# EAGLE board Door locking pcb (EAGLE 6.6.0)
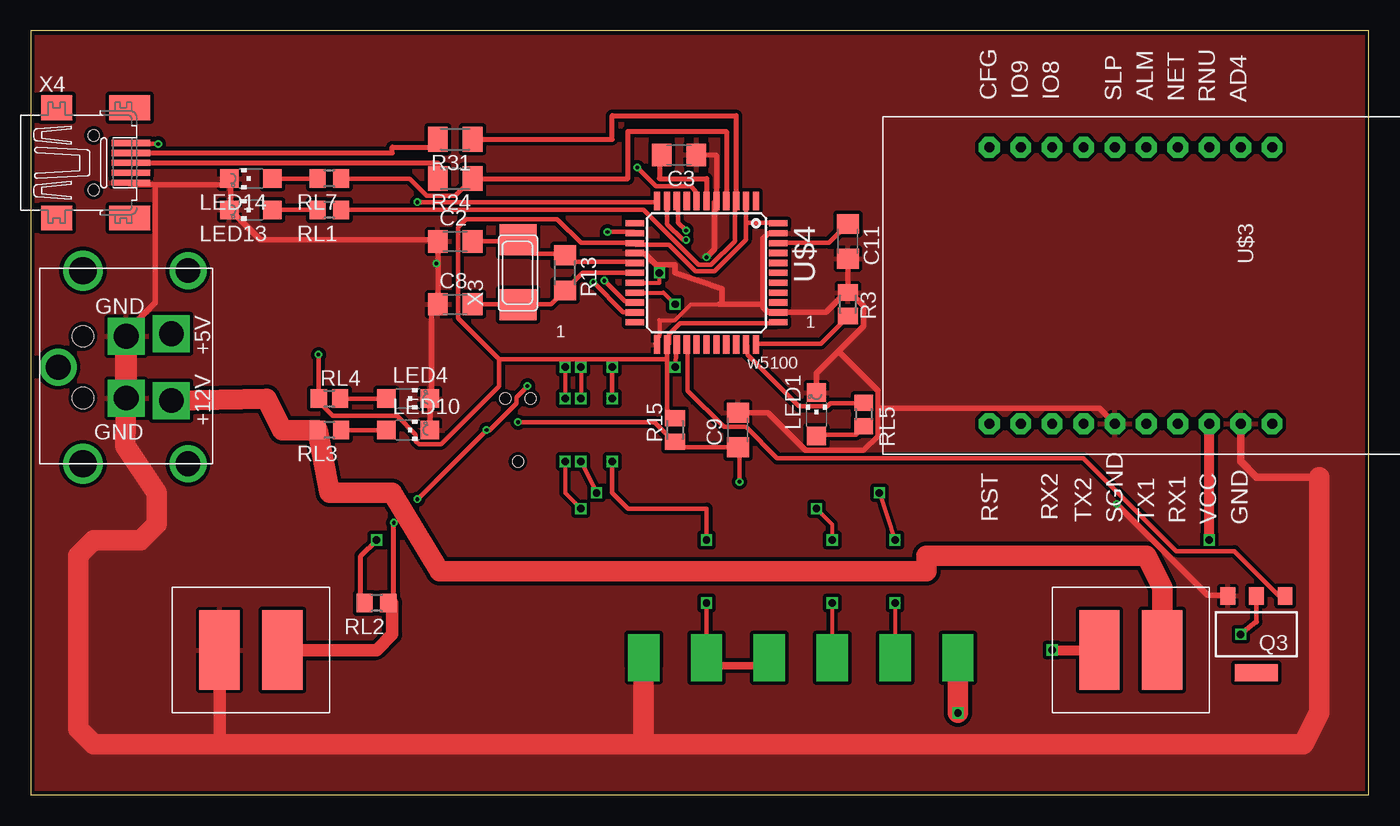
[diagram p0: board, top side]
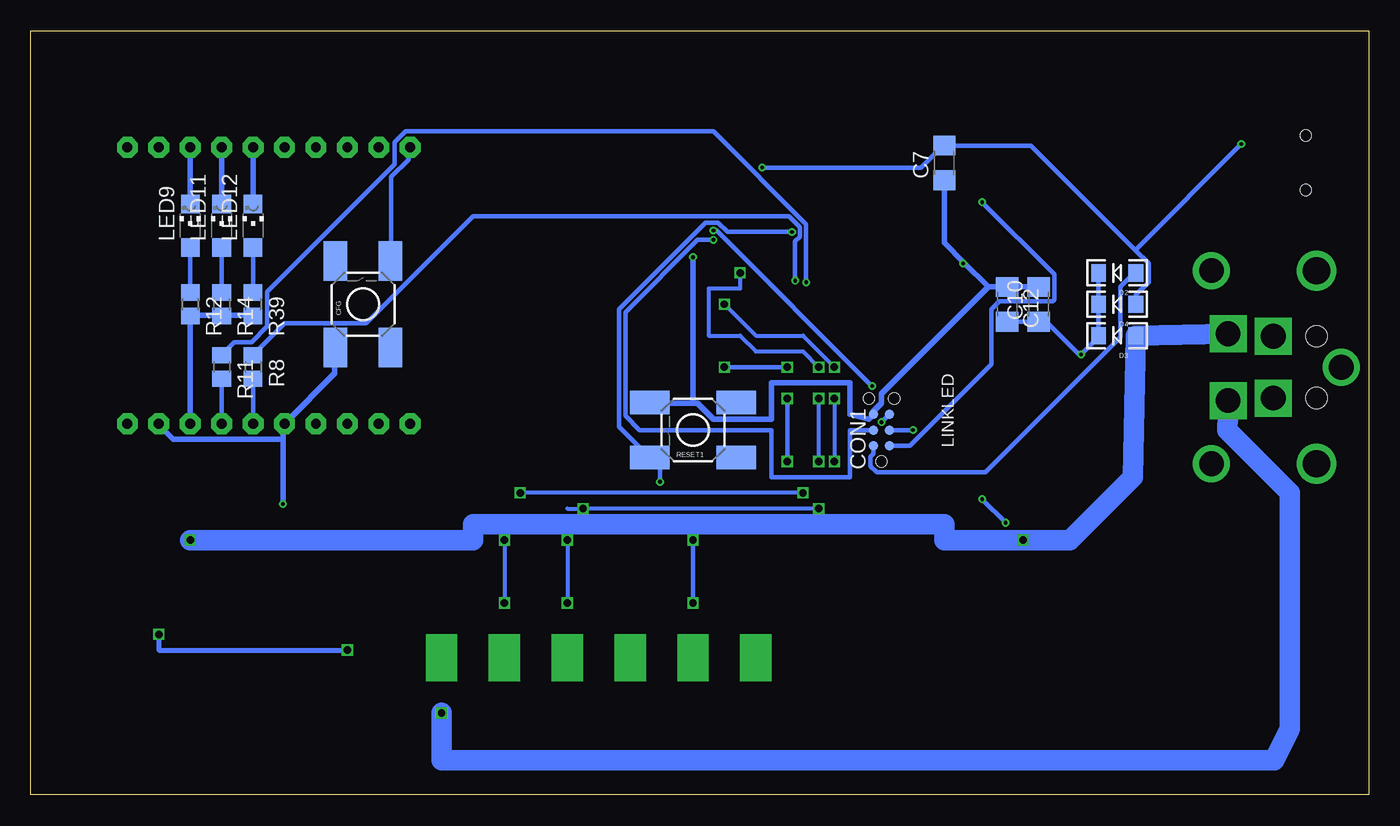
[diagram p1: board, bottom side, seen from below]

Size 108.13 x 61.71 mm. Coordinates in mm from the lower left corner, seen from the top.
Outline: 0,0 108.13,0 108.13,61.71 0,61.71 0,0
Copper layers (1*16): Top 0.035mm / dielectric 1.5mm / Bottom 0.035mm
Design rules "Fusion_eagle_rule_v1.1": minimum track width 6mil, minimum drill 12mil, track to track 6mil, track to pad 6mil, pad to pad 6mil, via to via 6mil, smd to smd 0mil, copper to edge 10mil, drill to drill 10mil, minimum pad ring 10mil, minimum via ring 6mil, stop-mask expansion 2mil, vias tented up to drill 100mil, thermal gap 10mil
Net classes: 0 default: width 0.356 mm; 1 power: width 0.457 mm; 2 VIN: width 0.457 mm; 3 fine: width 0.356 mm; 4 aref: width 0.356 mm
vRestrict: area 47,34.5 to 62.2,38.4; area 47,35.8 to 50.8,49.8; area 58.4,37.1 to 62.2,49.8; area 47,46 to 62.2,49.8; area 47,25.7 to 62.2,29.5

## Footprints (pad centres in the part's own frame; a part is rotated, then mirrored left to right if it is on the bottom)
C1206 = smd 1.6 x 1.8: 1 -1.4,0; 2 1.4,0
TACTILE_SWITCH_SMD = smd 3.175 x 1.905: 1 -3.493,2.223; 2 3.493,2.223; 3 -3.493,-2.223; 4 3.493,-2.223
TC2030-MCP-NL = smd 0.787 x 0.787: 5V 1.27,0.635; GND 3.81,0.635; MISO 1.27,-0.635; MOSI 2.54,0.635; RESET 3.81,-0.635; SCK 2.54,-0.635 | hole 0.889: 0,0; 5.08,-1.016; 5.08,1.016
LED-1206 = smd 1.2 x 1.4: A -1.5,0; C 1.5,0
2-PIN-5.08S = smd 3.251 x 6.452: 1 -2.54,0; 2 2.54,0
CHIPLED_1206 = smd 1.5 x 1.5: A 0,-1.75; C 0,1.75
ELPUTAS = drill 0 pad 2.54 square: P$3 -1.27,0; P$4 0,0
PG-SOT-223 = smd 1.2 x 1.4: 1 -2.311,-3.099; 2 0,-3.099; 3 2.311,-3.099 | smd 3.5 x 1.4: 4 0,3.099
M0805 = smd 1.3 x 1.6: 1 -0.95,0; 2 0.95,0
R0805 = smd 1.3 x 1.5: 1 -0.95,0; 2 0.95,0
R1206 = smd 1.6 x 1.803: 1 -1.422,0; 2 1.422,0
M1206 = smd 1.6 x 2: 1 -1.4,0; 2 1.4,0
R0805' = smd 1.3 x 1.5: 1 -0.85,0; 2 0.85,0
SZ05-ZIGBEE = drill 0.8 pad 1.676 octagon: 6 -11.415,13.971; 7 -11.415,11.431; 11 -11.415,1.271; 12 -11.415,-1.269; 13 -11.415,-3.809; 14 -11.415,-6.349; 17 10.925,-6.349; 18 10.925,-3.809; 19 10.925,-1.269; 25 10.925,13.971; ALM -11.415,3.811; CFG -11.415,-8.889; GND 10.925,11.431; NET -11.415,6.351; RNU -11.415,8.891; RST 10.925,-8.889; RX1 10.925,6.351; SGND 10.925,1.271; TX1 10.925,3.811; VCC 10.925,8.891
TQFP44 = smd 1.5 x 0.5: 1 -5.8,4; 2 -5.8,3.2; 3 -5.8,2.4; 4 -5.8,1.6; 5 -5.8,0.8; 6 -5.8,0; 7 -5.8,-0.8; 8 -5.8,-1.6; 9 -5.8,-2.4; 10 -5.8,-3.2; 11 -5.8,-4; 23 5.8,-4; 24 5.8,-3.2; 25 5.8,-2.4; 26 5.8,-1.6; 27 5.8,-0.8; 28 5.8,0; 29 5.8,0.8; 30 5.8,1.6; 31 5.8,2.4; 32 5.8,3.2; 33 5.8,4 | smd 0.5 x 1.5: 12 -4,-5.8; 13 -3.2,-5.8; 14 -2.4,-5.8; 15 -1.6,-5.8; 16 -0.8,-5.8; 17 0,-5.8; 18 0.8,-5.8; 19 1.6,-5.8; 20 2.4,-5.8; 21 3.2,-5.8; 22 4,-5.8; 34 4,5.8; 35 3.2,5.8; 36 2.4,5.8; 37 1.6,5.8; 38 0.8,5.8; 39 0,5.8; 40 -0.8,5.8; 41 -1.6,5.8; 42 -2.4,5.8; 43 -3.2,5.8; 44 -4,5.8
KPJX-4S-S = drill 2 square: +5V 2.7,1.35; +12V -2.7,1.35; GND1 -2.5,5; GND2 2.5,5 | drill 2: P$1 -7.8,0; P$2 7.8,0; P$11 0,10.5 | drill 2.2: P$3 -7.8,8.5; P$4 7.8,8.5 | hole 1.7: -2.5,8.5; 2.5,8.5
NX6035 = smd 2.5 x 3: P$1 2.665,0; P$2 -2.565,0
32005-201 = smd 3.1 x 0.5: 1 3,1.6; 2 3,0.8; 3 3,0; 4 3,-0.8; 5 3,-1.6 | smd 2.5 x 2: M1 -3,-4.45; M2 -3,4.45 | smd 3.3 x 2: M3 2.9,4.45; M4 2.9,-4.45 | hole 0.9: 0,2.2; 0,-2.2

## Placement (x,y rotation side)
C2  22pF  [C1206]  34.29,44.7 0 top
C3  100nF  [C1206]  52.39,51.69 180 top
C7  10uF  [C1206]  34.29,51.05 90 bottom
C8  22pF  [C1206]  34.29,39.62 0 top
C9  100nF  [C1206]  57.15,29.46 90 top
C10  10uF  [C1206]  26.67,39.62 90 bottom
C11  100nF  [C1206]  66.04,44.7 270 top
C12  100nF  [C1206]  29.21,39.62 270 bottom
CFG  Configure  [TACTILE_SWITCH_SMD]  81.28,39.62 90 bottom
CON1  SPI  [TC2030-MCP-NL]  39.37,26.92 90 bottom
D2  1N581D1206  [LED-1206]  20.32,42.16 180 bottom
D3  1N581D1206  [LED-1206]  20.32,37.08 180 bottom
D4  1N581D1206  [LED-1206]  20.32,39.62 180 bottom
J1  22--02  [2-PIN-5.08S]  88.9,11.68 180 top
J7  22--02  [2-PIN-5.08S]  17.78,11.68 180 top
LED1  GREEN  [CHIPLED_1206]  63.5,30.73 0 top
LED4  RED  [CHIPLED_1206]  30.48,32 270 top
LED9  RED  [CHIPLED_1206]  95.25,45.97 0 bottom
LED10  RED  [CHIPLED_1206]  30.48,29.46 270 top
LED11  RED  [CHIPLED_1206]  92.71,45.97 0 bottom
LED12  RED  [CHIPLED_1206]  90.17,45.97 0 bottom
LED13  RED  [CHIPLED_1206]  17.78,47.24 90 top
LED14  GREEN  [CHIPLED_1206]  17.78,49.78 90 top
PIN1  TERMINALSUPERFICIAL  [ELPUTAS]  69.85,11.68 90 top
PIN2  TERMINALSUPERFICIAL  [ELPUTAS]  64.77,11.68 90 top
PIN3  TERMINALSUPERFICIAL  [ELPUTAS]  59.69,11.68 90 top
PIN4  TERMINALSUPERFICIAL  [ELPUTAS]  54.61,11.68 90 top
PIN5  TERMINALSUPERFICIAL  [ELPUTAS]  49.53,11.68 90 top
PIN6  TERMINALSUPERFICIAL  [ELPUTAS]  74.93,11.68 90 top
Q3  BSP75  [PG-SOT-223]  99.06,12.95 180 top
R3  10k  [M0805]  66.04,39.62 270 top
R8  1K  [R0805]  90.17,34.54 270 bottom
R11  1K  [R0805]  92.71,34.54 270 bottom
R12  1K  [R0805]  95.25,39.62 270 bottom
R13  1M  [R1206]  43.18,42.16 270 top
R14  1K  [R0805]  92.71,39.62 270 bottom
R15  10k  [M0805]  52.07,29.46 90 top
R24  22  [M1206]  34.29,49.78 180 top
R31  22  [M1206]  34.29,52.96 180 top
R39  1K  [R0805]  90.17,39.62 270 bottom
RESET1  Reset uC  [TACTILE_SWITCH_SMD]  54.61,29.46 180 bottom
RL1  1K  [R0805]  24.13,47.24 180 top
RL2  10K  [R0805]  27.94,15.49 180 top
RL3  1K  [R0805]  24.13,29.46 180 top
RL4  1K  [R0805']  24.13,32 0 top
RL5  1K  [R0805]  67.31,30.73 270 top
RL7  1K  [R0805]  24.13,49.78 180 top
U$3  SZ05-ZIGBEE  [SZ05-ZIGBEE]  86.36,40.89 270 top
U$4  ATMEGA32U4-AU  [TQFP44]  54.61,42.16 270 top
U$6  KPJX-4S-S  [KPJX-4S-S]  12.7,34.54 90 top
X3  16MHz  [NX6035]  39.37,42.16 90 top
X4  MINI-USB  [32005-201]  5.08,51.05 0 top

## Library data of the parts
C2 C3 C7-C12 R8 R11-R14 R39 RL1-RL3 RL5 RL7 = rcl
CFG CON1 D2-D4 J1 J7 RESET1 U$3 U$6 X3 = lpatiny
LED1 LED4 LED9-LED14 U$4 = adafruit
PIN1-PIN6 = lomasenlibraries (3)
Q3 = infineon; OC_FARNELL: unknown; OC_NEWARK: unknown
R3 R15 R24 R31 RL4 = resistor
X4 = con-cypressindustries; OC_FARNELL: unknown; OC_NEWARK: unknown

## Nets
+5V [power]: D3.A R12.2 R14.2 R39.2 RL2.2 U$3.VCC U$6.+5V
+5V/1 [fine]: C10.1 C12.2 D2.C D3.C D4.C R15.2 RL4.1 U$4.2 U$4.14 U$4.24 U$4.34 U$4.44
+12V [power]: J1.1 PIN6.P$4 RL3.2 U$6.+12V
A0: U$4.36
A1: U$4.37
A2: U$4.38
A3: U$4.39
A4: U$4.40
A5: U$4.41
AREF: C11.1 U$4.42
CS: PIN3.P$3 PIN4.P$3 U$4.25
D5*: U$4.31
D6*: U$4.27
D7*: U$4.1
D8*: U$4.28
D9*: U$4.29
D10*: U$4.30
D11*: U$4.12
D12*: Q3.1 U$4.26
D13*: RL5.1 U$4.32
D+USB: R24.2 X4.3
D-USB: R31.2 X4.2
GND [power]: C2.1 C3.1 C7.1 C8.1 C9.2 C10.2 C11.2 C12.1 CFG.1 CON1.GND J7.2 LED1.C LED4.C LED10.C LED13.C LED14.C PIN5.P$3 Q3.3 R3.1 RESET1.4 U$3.GND U$3.SGND U$4.5 U$4.15 U$4.23 U$4.35 U$4.43 U$6.GND1 U$6.GND2 X4.5
GND1 [VIN]: LED9.C U$3.RNU
GND2 [VIN]: LED11.C U$3.NET
GND3 [VIN]: LED12.C U$3.ALM
HWB: R3.2 U$4.33
ISP+5V: CON1.5V D2.A
MISO: CON1.MISO U$4.11
MOSI: CON1.MOSI U$4.10
N$2: J1.2 Q3.2
N$3: LED1.A RL5.2
N$8: LED13.A RL1.2
N$11: R11.2 U$3.RX1
N$12: LED4.A RL4.2
N$14: LED14.A RL7.2
N$16: C3.2 U$4.6
N$24: R8.2 U$3.TX1
N$25: LED9.A R12.1
N$26: LED11.A R14.1
N$27: LED12.A R39.1
N$35: CFG.4 U$3.CFG
N$42: C8.2 R13.2 U$4.17 X3.P$2
N$75: LED10.A RL3.1
RD+: R24.1 RL7.1 U$4.4
RD-: R31.1 RL1.1 U$4.3
RESET: C9.1 CON1.RESET R15.1 RESET1.2 U$4.13
RX: R8.1 U$4.20
RXLED: U$4.8
SCK: CON1.SCK J7.1 RL2.1 U$4.9
SCL: PIN1.P$3 U$4.18
SDA: PIN2.P$3 U$4.19
TX: R11.1 U$4.21
TXLED: U$4.22
VUSB: C7.2 D4.A U$4.7 X4.1
XTAL1: C2.2 R13.1 U$4.16 X3.P$1

## Tracks (layer width: path | path; a pad name or v marks a point on that pad's centre or on a via)
+5V  (via drill 0.6)
  Top 0.406: RL2.2 26.67,15.49 26.67,19.3 v27.94,20.57
  Top 0.813: v95.25,20.57 U$3.VCC
  Bottom 0.457: R39.2 90.17,38.73 92.71,38.73 R14.2 92.84,38.73 95.25,38.73 R12.2 U$3.VCC
  Bottom 1.676: U$6.+5V D3.A 19.05,25.65 24.13,20.57 v27.94,20.57 34.29,20.57 34.29,21.84 52.07,21.84 72.39,21.84 72.39,20.57 v95.25,20.57
+5V/1  (via drill 0.3)
  Top 0.356: v23.24,35.56 23.24,32 RL4.1 23.37,31.88 23.37,31.62 24.38,30.61 29.59,30.61 31.11,29.08 31.11,28.57 31.37,28.32 33.15,28.32 37.85,33.02 37.85,35.18 | 57.78,46.23 57.78,47.88 U$4.2 | 57.78,46.23 57.78,44.83 55.24,42.29 53.72,42.29 51.56,44.45 48.9,44.45 U$4.14 48.64,44.58 44.45,44.58 42.55,46.48 35.18,46.48 34.54,45.85 34.54,38.48 37.85,35.18 | 57.78,46.23 60.33,46.23 U$4.44 | 51.44,35.18 51.44,31.12 52.07,30.48 R15.2 | 51.44,35.18 51.44,36.32 U$4.24 51.56,36.45 51.56,37.21 52.45,38.1 60.33,38.1 U$4.34 | 51.44,35.18 37.85,35.18
  Bottom 0.356: C12.2 C10.1 26.54,38.1 25.91,38.1 23.37,35.56 v23.24,35.56 21.84,36.96 D3.C 21.84,37.08 21.84,39.62 D4.C 21.84,39.75 21.84,42.16 D2.C
+12V  (via drill 0.6)
  Top 1.676: U$6.+12V 19.05,32 20.32,29.46 RL3.2 24.13,24.38 29.21,24.38 33.02,18.03 50.8,18.03 72.39,18.03 72.39,19.3 90.17,19.3 91.44,16.76 J1.1 | PIN6.P$4 v74.93,6.6
  Bottom 1.676: v74.93,6.6 74.93,2.79 7.62,2.79 6.35,5.33 6.35,24.38 11.43,29.46 U$6.+12V
AREF
  Top 0.356: U$4.42 60.45,44.58 64.52,44.58 C11.1
CS  (via drill 0.6)
  Top 0.356: U$4.25 v52.07,34.54 | v46.99,34.54 v46.99,32 | v46.99,26.92 46.99,24.38 48.26,23.11 54.61,23.11 v54.61,20.57 | v54.61,15.49 PIN4.P$3
  Top 0.61: PIN3.P$3 PIN4.P$3
  Bottom 0.356: v52.07,34.54 v46.99,34.54 | v46.99,32 v46.99,26.92 | v54.61,20.57 v54.61,15.49
D12*
  Top 0.356: Q3.1 101.35,16.13 100.84,16.13 97.28,19.68 92.58,19.68 85.09,27.18 60.33,27.18 57.78,29.72 56.01,29.72 53.09,32.64 53.09,36.32 U$4.26
D13*
  Top 0.356: RL5.1 67.31,31.62 64.64,31.62 64.39,31.37 62.1,31.37 57.91,35.56 57.91,36.32 U$4.32
D+USB
  Top 0.406: X4.3 32.89,51.05 R24.2
D-USB
  Top 0.406: X4.2 29.21,51.85 29.21,52.32 32.89,52.32 R31.2
GND  (via drill 0.3)
  Top 0.305: 50.55,36.45 50.8,37.08 50.8,38.35 52.07,38.35 53.34,39.62 55.88,39.62
  Top 0.406: C3.1 55.41,51.69 U$4.5
  Top 0.457: 55.88,39.62 55.88,40.89 52.07,42.16 52.07,42.8 50.55,42.8 49.66,43.69 48.9,43.69 U$4.15 | 50.55,36.45 U$4.23 | LED1.C 63.5,34.04 65.28,35.81 | 65.28,35.81 67.31,37.85 67.31,39.5 66.29,40.51 66.04,40.51 R3.1 | R3.1 65.91,40.64 64.26,38.99 60.45,38.99 U$4.35 60.2,38.99 59.56,38.99 59.18,39.37 59.18,39.62 | 59.18,39.62 59.18,44.96 59.56,45.34 60.33,45.34 U$4.43 | 68.45,31.24 68.45,32.64 65.28,35.81 | 68.45,31.24 68.45,28.96 67.31,27.81 62.61,27.81 59.56,30.86 C9.2 | R3.1 C11.2 | 59.18,39.62 55.88,39.62 | 55.88,39.62 55.63,39.62 | v87.76,23.5 95.12,16.13 96.65,16.13 Q3.3 | 68.45,31.24 86.36,31.24 U$3.SGND | v54.61,43.43 55.24,44.07 55.24,47.88 U$4.5 | LED10.C 32.26,29.46 32.26,32 LED4.C 32.38,32.13 32.38,39.12 32.77,39.5 C8.1 32.89,42.93 | 32.89,42.93 C2.1 32.77,44.83 18.54,44.83 16.26,47.12 LED13.C 16.13,47.24 16.13,49.78 LED14.C 16,49.28 10.03,49.28 | 10.03,49.28 8.26,49.28 8.13,49.4 X4.5 | 10.03,49.28 10.03,39.75 8.38,38.1 U$6.GND2 | 12.7,4.06 8.89,4.06 | v32.77,42.93 32.89,42.93
  Top 0.61: U$3.GND 97.79,26.92 99.06,25.65 104.14,25.65
  Top 1.016: J7.2 15.24,4.06
  Top 1.676: 49.53,4.06 15.24,4.06 12.7,4.06 5.08,4.06 3.81,5.33 3.81,19.3 5.08,20.57 8.89,20.57 10.16,21.84 10.16,24.38 7.62,28.19 U$6.GND1 | 49.53,4.06 102.87,4.06 104.14,6.6 104.14,25.65 | PIN5.P$3 49.53,4.06
  Top 1.778: U$6.GND1 U$6.GND2
  Top 2.54: U$6.GND2 7.62,37.04
  Bottom 0.457: 87.76,28.7 87.76,29.84 U$3.SGND 87.5,30.1 83.57,34.04 83.57,36.07 CFG.1 | 87.76,28.7 v87.76,23.5 | 30.73,41.02 39.37,32.38 39.37,31.62 40.01,30.99 CON1.GND 40.39,30.35 41.91,30.73 41.91,33.27 48.26,33.27 48.26,30.35 52.96,30.35 54.23,31.62 54.61,31.62 | 30.73,41.02 C12.1 29.08,41.02 C10.2 | C7.1 34.29,44.58 32.7,42.99 | 30.73,41.02 32.7,42.99 | 54.61,31.62 58.04,31.62 RESET1.4 | 54.61,31.62 v54.61,43.43 | v32.77,42.93 32.7,42.99 | 87.76,28.7 96.65,28.7 97.79,29.84 U$3.GND
  pour Top (isolate 0.305): 0,61.21 107.95,61.21 107.95,0.25 0,0.25
GND1
  Bottom 0.457: LED9.C 95.25,52.2 U$3.RNU
GND2
  Bottom 0.457: LED11.C 92.71,52.2 U$3.NET
GND3
  Bottom 0.457: LED12.C 90.17,52.2 U$3.ALM
HWB
  Top 0.356: U$4.33 58.67,36.45 63.88,36.45 66.04,38.61 R3.2
ISP+5V
  Bottom 0.356: CON1.5V 40.01,27.56 40.26,27.3 40.26,26.54 39.75,26.04 30.99,26.04 20.07,36.96 20.07,41.02 18.92,42.16 D2.A
MISO  (via drill 0.3)
  Top 0.356: v31.24,47.88 50.55,47.88 U$4.11
  Bottom 0.356: CON1.MISO 37.08,28.19 30.48,34.8 30.48,39.24 29.84,39.88 25.53,39.88 25.4,40 25.4,42.04 v31.24,47.88
MOSI  (via drill 0.3)
  Top 0.356: v52.96,44.83 52.7,44.83 51.44,46.1 51.44,47.88 U$4.10
  Bottom 0.356: CON1.MOSI 41.91,29.46 41.91,25.65 48.26,25.65 48.26,29.46 58.93,29.46 60.07,30.61 60.07,38.99 54.23,44.83 v52.96,44.83
N$2  (via drill 0.6)
  Top 0.356: 99.06,13.97 Q3.2 | J1.2 86.36,11.43
  Top 0.406: 99.06,13.97 v97.79,12.95
  Top 0.813: v82.55,11.68 J1.2
  Bottom 0.406: v97.79,12.95 97.79,11.68 v82.55,11.68
N$3
  Top 0.356: LED1.A 63.5,29.08 66.67,29.08 67.31,29.72 RL5.2
N$8
  Top 0.356: RL1.2 LED13.A
N$11
  Bottom 0.356: R11.2 U$3.RX1
N$12
  Top 0.356: LED4.A RL4.2
N$14
  Top 0.356: RL7.2 LED14.A
N$16
  Top 0.406: C3.2 50.8,51.05 50.8,49.78 54.61,49.78 U$4.6
N$24
  Bottom 0.356: R8.2 U$3.TX1
N$25
  Bottom 0.356: LED9.A R12.1
N$26
  Bottom 0.356: LED11.A R14.1
N$27
  Bottom 0.356: LED12.A R39.1
N$35
  Bottom 0.356: CFG.4 78.99,43.18 78.99,49.91 77.6,51.31 77.6,52.2 U$3.CFG
N$42
  Top 0.356: C8.2 39.37,39.62 X3.P$2 39.5,39.62 42.04,39.62 43.05,40.64 R13.2 43.18,40.77 44.58,42.16 U$4.17
N$75
  Top 0.356: LED10.A RL3.1
RD+
  Top 0.356: RL7.1 30.61,49.78 32,48.39 34.29,48.39 35.56,49.66 R24.1
  Top 0.406: R24.1 48.26,49.78 48.26,53.59 56.21,53.59 U$4.4
RD-
  Top 0.356: RL1.1 49.53,47.24 53.98,42.8 54.99,42.8 56.9,44.7 56.9,47.88 U$4.3
  Top 0.406: R31.1 46.99,52.96 46.99,54.86 57.01,54.86 U$4.3
RESET  (via drill 0.3)
  Top 0.356: v39.37,30.1 50.42,30.1 52.07,28.45 R15.1 52.2,28.45 52.58,28.07 C9.1 57.28,27.94 v57.28,25.27 | v46.61,45.47 48.77,45.47 U$4.13
  Bottom 0.356: v39.37,30.1 CON1.RESET | v46.61,45.47 51.82,45.47 52.58,46.23 53.59,46.23 60.58,39.24 60.58,29.72 RESET1.2 57.28,26.42 v57.28,25.27
RX  (via drill 0.3)
  Top 0.356: v46.35,41.53 48.01,39.88 48.77,39.88 U$4.20
  Bottom 0.356: v46.35,41.53 46.35,44.7 45.97,45.08 45.97,45.85 46.86,46.74 72.39,46.74 81.03,38.1 87.63,38.1 90.17,35.56 R8.1
SCK  (via drill 0.3)
  Top 0.356: v31.24,23.88 v36.83,29.46 37.08,29.46 39.24,31.62 39.24,32.13 v40.13,33.02 | v52.96,45.59 52.32,46.23 52.32,47.88 U$4.9
  Top 0.406: 29.21,15.49 29.34,15.49 v29.34,21.97
  Top 1.016: J7.1 27.94,11.68 29.21,12.95 29.21,15.49 RL2.1
  Bottom 0.356: v36.83,29.46 CON1.SCK | v29.34,21.97 v31.24,23.88 | v52.96,45.59 52.7,45.59 v40.13,33.02
SCL  (via drill 0.6)
  Top 0.305: U$4.18 50.8,41.36 v50.8,42.16 | v44.45,34.54 v44.45,32 | v44.45,26.92 v45.72,24.38 | v68.58,24.38 v69.85,20.57 | v69.85,15.49 PIN1.P$3
  Bottom 0.305: v50.8,42.16 50.8,40.89 53.34,40.89 53.34,37.08 50.8,37.08 49.53,35.81 45.72,35.81 v44.45,34.54 | v44.45,32 v44.45,26.92 | v45.72,24.38 v68.58,24.38 | v69.85,20.57 v69.85,15.49
SDA  (via drill 0.6)
  Top 0.305: U$4.19 51.13,40.56 v52.07,39.62 | v43.18,34.54 v43.18,32 | v43.18,26.92 43.18,24.38 v44.45,23.11 | v63.5,23.11 64.77,21.84 v64.77,20.57 | v64.77,15.49 PIN2.P$3
  Bottom 0.305: v52.07,39.62 49.53,37.08 45.72,37.08 v43.18,34.54 | v43.18,32 v43.18,26.92 | v44.45,23.11 v63.5,23.11 64.77,23.11 | v64.77,20.57 v64.77,15.49
TX  (via drill 0.3)
  Top 0.356: v45.47,41.4 47.88,38.99 48.77,38.99 U$4.21
  Bottom 0.356: v45.47,41.4 45.47,46.1 52.96,53.59 77.85,53.59 78.74,52.7 78.74,50.93 89.03,40.64 89.03,37.85 90.3,36.58 91.69,36.58 92.71,35.56 R11.1
VUSB  (via drill 0.3)
  Top 0.356: v49.02,50.67 50.55,49.15 53.34,49.15 53.72,48.77 53.72,48.01 U$4.7 | v10.29,52.58 8.13,52.58 X4.1
  Bottom 0.356: 18.86,44.01 27.3,52.45 C7.2 34.42,52.45 36.2,50.67 v49.02,50.67 | 18.86,44.01 17.78,42.93 17.78,41.4 18.8,40.39 18.8,39.62 D4.A | 18.86,44.01 v10.29,52.58
XTAL1
  Top 0.356: U$4.16 48.77,43.05 43.69,43.05 43.18,43.56 R13.1 43.05,43.69 40.51,43.69 39.5,44.7 X3.P$1 39.37,44.7 C2.2

## Text on the board
tNames: 1 | 1 | w5100
bNames: LINKLED
tValues: Sensor | Locker | GND | Buzzer | D0 | D1 | 12V | GND | INT1 | Wiegand | DRAIN | 12V
tDocu: Door Locking PCB v1.0
203bmp: C:/Users/G/Pictures/logo_epfl.bmp